# Altium PCB SkayboardRev4.PcbDoc (part 2 of 2)
Units mil, origin at the board's own origin, x right, y up, seen from the top; angles counter-clockwise.
Board outline 13972.57 x 4222.54 mil, 2 copper layers (Top Layer, Bottom Layer); 143 components, 152 nets, 1430 pads, 166 vias.
Unrouted connection lines stored in the file: 1.
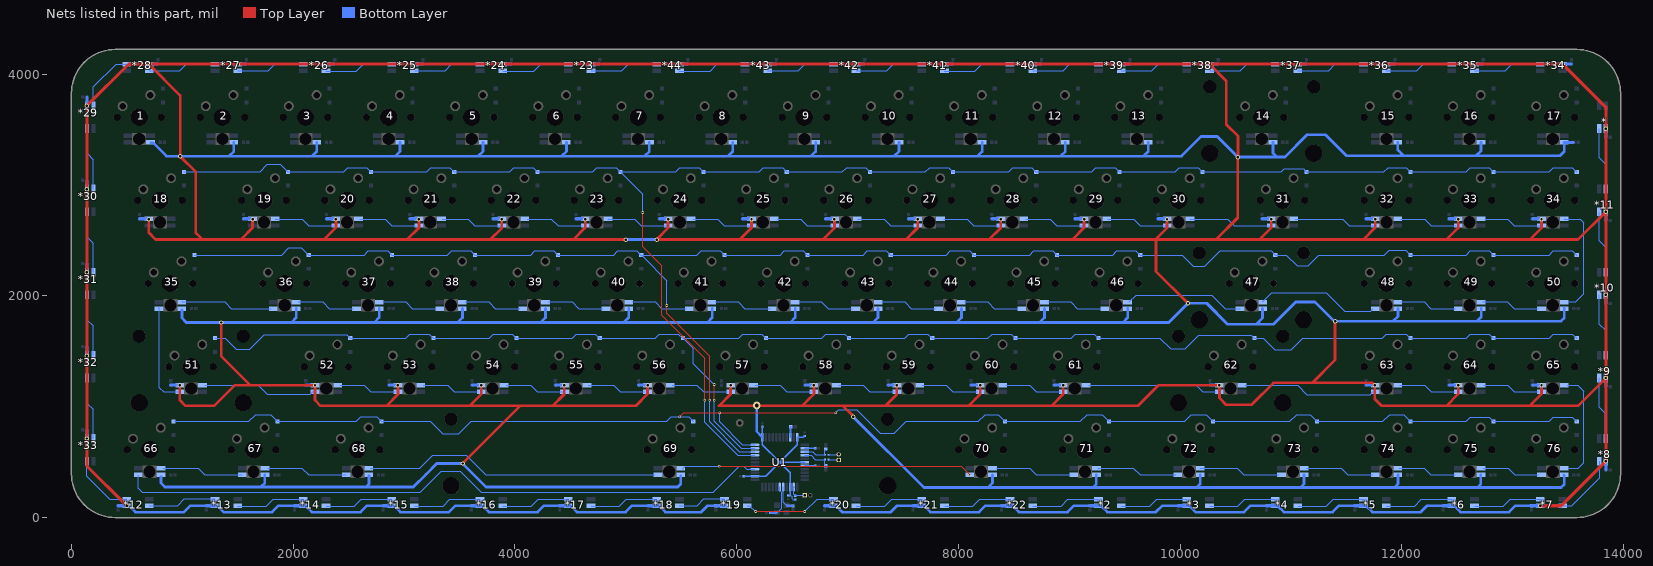
[diagram p2: the nets of this part, all layers, seen from the top]

## Via types
v1: diameter 24, hole 12, Top Layer to Bottom Layer, 92 vias
v2: diameter 40, hole 22, Top Layer to Bottom Layer, 73 vias
v3: diameter 30, hole 15, Top Layer to Bottom Layer, 1 vias

## Nets (pads, with @x,y where several pads share a name; then routed paths per layer and width w, separated by ;. In a path a pad name is that pad's centre, name@x,y a point inside that pad or via, vN(x,y) a via of type N, cw(c..) or ccw(c..) an arc to the next point about the centre after c; other vN are vias at no path point) (continued)
Net18_6: 18.6 19.6 20.6 21.6 22.6 23.6 24.6 25.6 26.6 27.6 28.6 29.6 30.6 31.6 32.6 33.6 34.6 U1.30 | length 16219.8
  Top Layer w5: v1(5153.54,2751.97) 5153.54,2440.94 5322.83,2271.65 5322.83,1826.77 5712.6,1437.01 v1(5712.6,1059.06)
  Bottom Layer w5: 18.6@1014.86,3118.5 1701.18,3118.5 1767.72,3185.04 1884.89,3185.04 1951.4,3118.53 19.6@1952.39,3118.53 2454.22,3118.53 2491.17,3155.49 2664.45,3155.49 20.6@2701.43,3118.51 ; 20.6@2702.39,3118.53 3204.22,3118.53 3241.17,3155.49 3414.45,3155.49 3451.43,3118.51 3953.26,3118.51 3990.22,3155.46 4163.49,3155.46 4200.48,3118.48 4702.3,3118.48 4739.26,3155.44 4912.54,3155.44 4949.52,3118.46 23.6@4952.4,3118.53 ; 23.6@4952.4,3118.53 4953.38,3118.53 23.6@4953.46,3118.46 ; v1(5153.54,2751.97) 5153.54,2917.39 4968.6,3102.33 4968.6,3103.31 23.6@4953.46,3118.46 ; 24.6@5698.56,3118.43 5661.58,3155.41 5488.3,3155.41 5451.35,3118.46 23.6@4953.46,3118.46 ; 24.6@5702.4,3118.53 6204.23,3118.53 6241.18,3155.49 6414.46,3155.49 25.6@6451.44,3118.51 ; v1(5712.6,1059.06) 5712.6,858.27 6007.87,562.99 6041.78,562.99 U1.30@6165.35,562.99 ; 25.6@6452.4,3118.53 6954.23,3118.53 6991.18,3155.49 7164.46,3155.49 7201.44,3118.51 7703.27,3118.51 7740.23,3155.46 7913.51,3155.46 7950.49,3118.48 8452.32,3118.48 8489.27,3155.44 8662.55,3155.44 28.6@8699.53,3118.46 ; 28.6@8702.4,3118.53 9204.23,3118.53 9241.18,3155.49 9414.46,3155.49 29.6@9451.44,3118.51 ; 29.6@9452.4,3118.53 9954.23,3118.53 9991.18,3155.49 10164.46,3155.49 30.6@10201.44,3118.51 ; 30.6@10202.4,3118.53 10912.52,3118.53 10939.65,3145.67 11112.93,3145.67 11123.66,3134.95 11123.66,3133.73 11148.7,3108.69 31.6@11149.91,3108.69 ; 31.6@11139.86,3118.51 11838.98,3118.51 11875.94,3155.47 12039.6,3155.47 12061.2,3133.87 12061.2,3133.75 12076.41,3118.53 32.6@12077.4,3118.53 ; 32.6@12078.69,3118.53 12579.23,3118.53 12616.18,3155.49 12789.46,3155.49 12826.44,3118.51 13328.27,3118.51 13365.23,3155.46 13538.51,3155.46 34.6@13575.49,3118.48
Net19_4: 19.4 20.2 | length 551.1
  Bottom Layer w5: 19.4@1838.68,2693.96 1839.72,2692.91 2079.73,2692.91 2138.78,2633.86 20.2@2364.88,2633.86
Net20_4: 20.4 21.2 | length 531
  Bottom Layer w5: 20.4@2602.14,2692.91 2829.73,2692.91 2888.78,2633.86 21.2@3108.72,2633.86
Net21_4: 21.4 22.2 | length 550.9
  Bottom Layer w5: 21.4@3346.07,2692.91 3579.73,2692.91 3638.78,2633.86 22.2@3872.49,2633.86
Net22_4: 22.4 23.2 | length 522.4
  Bottom Layer w5: 22.4@4109.72,2692.91 4329.74,2692.91 4388.8,2633.86 23.2@4607.66,2633.86
Net23_4: 23.4 24.2 | length 549
  Bottom Layer w5: 23.4@4838.69,2693.96 4839.74,2692.91 5079.74,2692.91 5138.8,2633.86 24.2@5362.78,2633.86
Net24_4: 24.4 25.2 | length 539.7
  Bottom Layer w5: 24.4@5608.71,2692.91 5829.74,2692.91 5888.8,2633.86 25.2@6123.92,2633.86
Net25_4: 25.4 26.2 | length 515.4
  Bottom Layer w5: 25.4@6367.38,2692.91 6579.74,2692.91 6638.8,2633.86 26.2@6858.37,2633.86
Net26_4: 26.4 27.2 | length 530.9
  Bottom Layer w5: 26.4@7091.74,2692.91 7329.74,2692.91 7388.8,2633.86 27.2@7598.16,2633.86
Net27_4: 27.4 28.2 | length 519
  Bottom Layer w5: 27.4@7865.9,2692.91 8079.74,2692.91 8138.8,2633.86 28.2@8360.46,2633.86
Net28_4: 28.4 29.2 | length 546.4
  Bottom Layer w5: 28.4@8608.01,2692.91 8829.74,2692.91 8888.8,2633.86 29.2@9129.92,2633.86
Net29_4: 29.4 30.2 | length 548
  Bottom Layer w5: 29.4@9348.83,2692.91 9579.74,2692.91 9638.8,2633.86 30.2@9872.4,2633.86
Net30_4: 30.4 31.2 | length 738.7
  Bottom Layer w5: 30.4@10088.69,2693.96 10089.74,2692.91 10429.13,2692.91 10488.19,2633.86 31.2@10802.54,2633.86
Net31_4: 31.4 32.2 | length 734.4
  Bottom Layer w5: 31.4@11037.96,2692.91 11468.5,2692.91 11527.56,2633.86 32.2@11747.9,2633.86
Net32_4: 32.4 33.2 | length 528.4
  Bottom Layer w5: 32.4@11988.48,2692.91 12204.74,2692.91 12263.8,2633.86 33.2@12492.42,2633.86
Net33_4: 33.4 34.2 | length 521.6
  Bottom Layer w5: 33.4@12746.18,2692.91 12954.74,2692.91 13013.8,2633.86 34.2@13243.35,2633.86
Net34_4: 34.4 50.4 | length 1003.3
  Bottom Layer w5: 34.4@13463.69,2693.96 13464.74,2692.91 13610.24,2692.91 13641.73,2661.42 13641.73,2019.68 13566.93,1944.88 50.4@13502.71,1944.88
Net35_2: 35.2 51.2 | length 911.2
  Bottom Layer w5: 35.2@791.34,1899.65 791.34,1173.23 830.71,1133.86 51.2@959.8,1133.86
Net35_4: 35.4 36.2 | length 828.5
  Bottom Layer w5: 35.4@996.69,1944.88 1381.89,1944.88 1440.94,1885.83 36.2@1800.71,1885.83
Net35_6: 35.6 36.6 37.6 38.6 39.6 40.6 41.6 42.6 43.6 44.6 45.6 46.6 47.6 48.6 49.6 50.6 U1.31 | length 15388.5
  Top Layer w5: v1(5370.08,1913.39) 5370.08,1842.52 5755.91,1456.69 v1(5755.91,1059.06)
  Bottom Layer w5: 35.6@1108.61,2368.5 1896.06,2368.5 1960.63,2433.07 2074.31,2433.07 2138.87,2368.5 36.6@2139.86,2368.5 2641.69,2368.5 2678.64,2405.46 2851.92,2405.46 2888.9,2368.48 3391.72,2368.48 3428.67,2405.43 3601.95,2405.43 3638.93,2368.45 4140.76,2368.45 4177.72,2405.41 4351,2405.41 4387.98,2368.43 4889.81,2368.43 4926.76,2405.38 5100.04,2405.38 40.6@5137.02,2368.4 ; 40.6@5139.86,2368.51 40.6@5140.84,2368.51 ; v1(5370.08,1913.39) 5370.08,2138.29 5156.06,2352.31 5156.06,2353.3 40.6@5140.88,2368.48 ; v1(5755.91,1059.06) 5755.91,863.12 6024.53,594.49 U1.31@6165.35,594.49 ; 41.6@5888.93,2368.45 5851.95,2405.43 5678.67,2405.43 5641.72,2368.48 40.6@5140.88,2368.48 ; 41.6@5889.82,2368.48 6391.65,2368.48 6428.61,2405.43 6601.88,2405.43 6638.87,2368.45 7140.69,2368.45 7177.65,2405.41 7350.93,2405.41 43.6@7387.91,2368.43 ; 43.6@7389.86,2368.51 7891.73,2368.48 7928.68,2405.43 8101.96,2405.43 44.6@8138.94,2368.45 ; 44.6@8139.86,2368.51 8641.73,2368.48 8678.68,2405.43 8851.96,2405.43 45.6@8888.94,2368.45 ; 45.6@8889.86,2368.51 9391.73,2368.48 9428.68,2405.43 9601.96,2405.43 46.6@9638.94,2368.45 ; 46.6@9639.86,2368.51 10017.32,2368.51 10118.11,2267.72 10224.41,2267.72 10362.2,2405.51 10820.61,2405.51 10857.61,2368.51 47.6@10858.6,2368.51 10958.26,2368.51 11055.12,2271.65 11157.48,2271.65 11251.97,2366.14 11842.52,2366.14 11885.83,2409.45 12035.5,2409.45 12076.41,2368.53 48.6@12077.4,2368.53 12579.23,2368.53 12616.18,2405.49 12789.46,2405.49 12826.44,2368.51 13328.27,2368.51 13365.23,2405.46 13538.51,2405.46 50.6@13575.49,2368.48
Net36_4: 36.4 37.2 | length 519.2
  Bottom Layer w5: 36.4@2047.66,1944.88 2265.2,1944.88 2324.26,1885.83 37.2@2542.42,1885.83
Net37_4: 37.4 38.2 | length 507.5
  Bottom Layer w5: 37.4@2808.29,1944.88 3015.2,1944.88 3074.26,1885.83 38.2@3291.33,1885.83
Net38_4: 38.4 39.2 | length 516.7
  Bottom Layer w5: 38.4@3549.78,1944.88 3765.2,1944.88 3824.26,1885.83 39.2@4042.03,1885.83
Net39_4: 39.4 40.2 | length 514.3
  Bottom Layer w5: 39.4@4300.35,1944.88 4515.21,1944.88 4574.27,1885.83 40.2@4790.23,1885.83
Net40_4: 40.4 41.2 | length 510.7
  Bottom Layer w5: 40.4@5058.37,1944.88 5265.21,1944.88 5324.27,1885.83 41.2@5544.6,1885.83
Net41_4: 41.4 42.2 | length 522.3
  Bottom Layer w5: 41.4@5806.24,1944.88 6015.21,1944.88 6074.27,1885.83 42.2@6304.05,1885.83
Net42_4: 42.4 43.2 | length 507.5
  Bottom Layer w5: 42.4@6560.55,1944.88 6765.21,1944.88 6824.27,1885.83 43.2@7043.59,1885.83
Net43_4: 43.4 44.2 | length 507
  Bottom Layer w5: 43.4@7308.51,1944.88 7515.21,1944.88 7574.27,1885.83 44.2@7791,1885.83
Net44_4: 44.4 45.2 | length 505.8
  Bottom Layer w5: 44.4@8054.69,1944.88 8265.21,1944.88 8324.27,1885.83 45.2@8536.01,1885.83
Net45_4: 45.4 46.2 | length 504.5
  Bottom Layer w5: 45.4@8804.09,1944.88 9015.21,1944.88 9074.27,1885.83 46.2@9284.14,1885.83
Net46_4: 46.4 47.2 | length 1070.6
  Bottom Layer w5: 46.4@9543.31,1944.88 9602.36,2003.94 10287.4,2003.94 10405.51,1885.83 10539.21,1885.83 47.2@10540.15,1884.89
Net47_4: 47.4 48.2 | length 1102.4
  Bottom Layer w5: 47.4@10744.09,1944.88 10826.77,2027.56 10850.39,2027.56 ; 10850.16,2027.56 11318.9,2027.56 11483.2,1863.25 11717.61,1863.25 48.2@11736.22,1881.87
Net48_4: 48.4 49.2 | length 515.7
  Bottom Layer w5: 48.4@11991.19,1944.88 12202.77,1944.88 12261.83,1885.83 49.2@12482.47,1885.83
Net49_4: 49.4 50.2 | length 525.9
  Bottom Layer w5: 49.4@12731.11,1944.88 12952.77,1944.88 13011.83,1885.83 50.2@13232.54,1885.83
Net51_4: 51.4 52.2 | length 1021.9
  Bottom Layer w5: 51.4@1200.73,1192.91 1685.04,1192.91 1764.72,1113.23 2155.09,1113.23 2175.71,1133.86 52.2@2181.1,1133.86
Net51_6: 51.6 52.6 53.6 54.6 55.6 56.6 57.6 58.6 59.6 60.6 61.6 62.6 63.6 64.6 65.6 U1.32 | length 14269.3
  Top Layer w5: v1@5794,1061.72 5799.21,1066.93 v1(5799.21,1200.79)
  Bottom Layer w5: 51.6@1296.11,1618.5 1389.37,1618.5 1488.19,1519.68 1610.24,1519.68 1740.16,1649.61 2482.78,1649.61 2513.87,1618.51 52.6@2514.86,1618.51 3016.69,1618.51 3053.64,1655.46 3226.92,1655.46 3263.9,1618.48 3766.72,1618.48 3803.67,1655.44 3976.95,1655.44 4013.93,1618.46 4515.76,1618.46 4552.72,1655.41 4726,1655.41 4762.98,1618.43 5264.81,1618.43 5301.76,1655.39 5475.04,1655.39 56.6@5512.02,1618.41 ; 56.6@5514.86,1618.52 56.6@5519.28,1618.52 ; v1(5799.21,1059.06) 5799.21,867.05 6040.28,625.98 U1.32@6165.35,625.98 ; v1@5801.51,1198.49 5798.78,1198.49 5795.58,1201.69 5795.58,1204.42 5610.24,1389.76 5610.24,1527.56 5519.31,1618.48 6016.72,1618.48 6053.67,1655.44 6226.95,1655.44 57.6@6263.93,1618.46 ; 57.6@6264.82,1618.48 6766.65,1618.48 6803.61,1655.44 6976.88,1655.44 7013.87,1618.46 7515.69,1618.46 7552.65,1655.41 7725.93,1655.41 59.6@7762.91,1618.43 ; 59.6@7764.86,1618.52 8266.73,1618.48 8303.68,1655.44 8476.96,1655.44 60.6@8513.94,1618.46 ; 60.6@8514.86,1618.52 9016.73,1618.48 9053.68,1655.44 9226.96,1655.44 61.6@9263.94,1618.46 ; 61.6@9264.86,1618.52 9818.49,1618.52 9913.39,1523.62 10047.24,1523.62 10169.29,1645.67 10642.98,1645.67 10670.13,1618.52 62.6@10671.12,1618.52 10751.56,1618.52 10854.33,1515.75 11003.94,1515.75 11106.3,1618.11 11822.83,1618.11 11858.27,1653.54 12041.41,1653.54 12076.41,1618.54 63.6@12077.4,1618.54 12579.23,1618.54 12616.18,1655.49 12789.46,1655.49 12826.44,1618.51 13328.27,1618.51 13365.23,1655.47 13538.51,1655.47 65.6@13575.49,1618.49
Net52_4: 52.4 53.2 | length 519.9
  Bottom Layer w5: 52.4@2423.73,1192.91 2642.18,1192.91 2701.23,1133.86 53.2@2919.12,1133.86
Net53_4: 53.4 54.2 | length 516.3
  Bottom Layer w5: 53.4@3172.94,1192.91 3392.18,1192.91 3451.23,1133.86 54.2@3664.74,1133.86
Net54_4: 54.4 55.2 | length 532.9
  Bottom Layer w5: 54.4@3923.58,1192.91 4142.19,1192.91 4201.24,1133.86 55.2@4432.04,1133.86
Net55_4: 55.4 56.2 | length 530.6
  Bottom Layer w5: 55.4@4662.29,1192.91 4892.19,1192.91 4951.24,1133.86 56.2@5168.45,1133.86
Net56_4: 56.4 57.2 | length 522.5
  Bottom Layer w5: 56.4@5418.48,1192.91 5642.19,1192.91 5701.24,1133.86 57.2@5916.47,1133.86
Net57_4: 57.4 58.2 | length 532
  Bottom Layer w5: 57.4@6166.24,1192.91 6392.19,1192.91 6451.24,1133.86 58.2@6673.77,1133.86
Net58_4: 58.4 59.2 | length 524.9
  Bottom Layer w5: 58.4@6918.92,1192.91 7142.19,1192.91 7201.24,1133.86 59.2@7419.34,1133.86
Net59_4: 59.4 60.2 | length 520.4
  Bottom Layer w5: 59.4@7672.6,1192.91 7892.19,1192.91 7951.24,1133.86 60.2@8168.58,1133.86
Net60_4: 60.4 61.2 | length 518
  Bottom Layer w5: 60.4@8428.94,1192.91 8642.19,1192.91 8701.24,1133.86 61.2@8922.43,1133.86
Net61_4: 61.4 62.2 | length 1174.2
  Bottom Layer w5: 61.4@9176.64,1192.91 10145.67,1192.91 10204.72,1133.86 62.2@10326.41,1133.86
Net62_4: 62.4 63.2 | length 1221.9
  Bottom Layer w5: 62.4@10582.01,1192.91 11059.06,1192.91 11141.73,1110.24 11714.6,1110.24 11738.23,1133.86 63.2@11759.84,1133.86
Net63_4: 63.4 64.2 | length 517.1
  Bottom Layer w5: 63.4@11982.85,1192.91 12204.74,1192.91 12263.8,1133.86 64.2@12475.51,1133.86
Net64_4: 64.4 65.2 | length 515.3
  Bottom Layer w5: 64.4@12739.63,1192.91 12954.74,1192.91 13013.8,1133.86 65.2@13230.45,1133.86
Net65_4: 65.4 76.4 | length 971.9
  Bottom Layer w5: 65.4@13493.97,1192.91 13586.61,1192.91 13641.73,1137.8 13641.73,496.06 13590.55,444.88 13503.4,444.88
Net66_2: 66.2 U1.26 | length 5960.6
  Bottom Layer w5: 66.2@602.36,381.31 602.36,263.78 637.8,228.35 3145.67,228.35 3334.65,417.32 3507.87,417.32 3696.31,228.88 5787.94,228.88 6023.62,464.57 6062.99,464.57 6090.55,437.01 U1.26@6165.35,437.01
Net66_4: 66.4 67.2 | length 737.3
  Bottom Layer w5: 66.4@827.73,444.88 1141.73,444.88 1200.79,385.83 1539.22,385.83 67.2@1540.16,384.88
Net66_6: 66.6 67.6 68.6 69.6 70.6 71.6 72.6 73.6 74.6 75.6 76.6 U1.33 | length 13938.8
  Top Layer w5: v1(5488.07,909.45) 5523.5,944.88 v1(5846.46,944.88) v1(6893.7,944.88)
  Bottom Layer w5: 66.6@921.11,868.51 1600.79,868.51 1661.42,929.13 1797,929.13 1857.63,868.51 67.6@1858.61,868.51 2569.3,868.51 2610.24,909.45 2753.21,909.45 2794.15,868.51 68.6@2795.13,868.51 ; 68.6@2796.11,868.51 3237.79,868.51 3350.39,755.91 3492.13,755.91 3606.3,870.08 5370.08,870.08 5409.45,909.45 v1(5488.07,909.45) 5566.68,909.45 5607.61,868.52 69.6@5608.6,868.52 ; v1(5846.46,944.88) 5846.46,863.12 6052.09,657.48 U1.33@6165.35,657.48 ; v1(6893.7,944.88) 6921.26,972.44 7082.68,972.44 7295.28,759.84 7421.26,759.84 7531.5,870.08 8181.1,870.08 8240.16,929.13 8359.52,929.13 8420.13,868.52 70.6@8421.12,868.52 9100.8,868.52 9161.43,929.15 9297.01,929.15 9357.64,868.52 10041.75,868.52 10102.38,929.15 10233.53,929.15 10294.16,868.52 72.6@10295.14,868.52 ; 72.6@10296.12,868.52 10990.56,868.52 11051.19,929.15 11172.01,929.15 11232.64,868.52 11829.15,868.52 11889.76,929.13 12016.8,929.13 74.6@12077.4,868.54 ; 74.6@12080.29,868.54 12579.23,868.54 12616.18,905.49 12789.46,905.49 12826.44,868.51 13328.27,868.51 13365.23,905.47 13538.51,905.47 76.6@13575.49,868.49
Net67_4: 67.4 68.2 | length 729.8
  Bottom Layer w5: 67.4@1772.68,444.88 2079.24,444.88 2138.3,385.83 2476.72,385.83 68.2@2477.66,384.89
Net68_4: 68.4 69.2 | length 2690.1
  Bottom Layer w5: 68.4@2695.17,444.88 3141.73,444.88 3259.84,562.99 3559.06,562.99 3736.22,385.83 69.2@5262.93,385.83
Net69_4: 69.4 70.2 | length 2633
  Top Layer w5: v1(5842.52,464.57) 8023.62,464.57 v1(8102.36,385.83)
  Bottom Layer w5: 69.4@5511.81,440.94 5535.43,464.57 v1(5842.52,464.57)
Net70_4: 70.4 71.2 | length 691
  Bottom Layer w5: 70.4@8342.89,444.88 8641.76,444.88 8700.81,385.83 71.2@9009.42,385.83
Net71_4: 71.4 72.2 | length 730.7
  Bottom Layer w5: 71.4@9256.38,444.88 9579.24,444.88 9638.29,385.83 72.2@9962.61,385.83
Net72_4: 72.4 73.2 | length 732.6
  Bottom Layer w5: 72.4@10182.39,443.95 10183.33,444.88 10516.76,444.88 10575.81,385.83 73.2@10890.18,385.83
Net73_4: 73.4 74.2 | length 626.8
  Bottom Layer w5: 73.4@11136.36,444.88 11454.24,444.88 11513.29,385.83 74.2@11738.73,385.83
Net74_4: 74.4 75.2 | length 529.2
  Bottom Layer w5: 74.4@11976.7,444.88 12202.78,444.88 12261.83,385.83 75.2@12481.42,385.83
Net75_4: 75.4 76.2 | length 522.1
  Bottom Layer w5: 75.4@12736.3,444.88 12958.51,444.88 13017.56,385.83 76.2@13233.97,385.83
Net*2_2: *2.2 *22.4 | length 618.4
  Bottom Layer w5: *22.4@8670.87,103.8 8926.63,103.8 8988.19,165.35 *2.2@9263.78,165.35
Net*2_4: *2.4 *3.2 | length 618.4
  Bottom Layer w5: *2.4@9470.08,103.8 9725.84,103.8 9787.4,165.35 *3.2@10062.99,165.35
Net*3_4: *3.4 *4.2 | length 618.4
  Bottom Layer w5: *3.4@10265.35,103.8 10521.12,103.8 10582.68,165.35 *4.2@10858.27,165.35
Net*4_4: *4.4 *5.2 | length 618.4
  Bottom Layer w5: *4.4@11064.57,103.8 11320.33,103.8 11381.89,165.35 *5.2@11657.48,165.35
Net*5_4: *5.4 *6.2 | length 618.4
  Bottom Layer w5: *5.4@11859.84,103.8 12115.61,103.8 12177.17,165.35 *6.2@12452.76,165.35
Net*6_4: *6.4 *7.2 | length 618.4
  Bottom Layer w5: *6.4@12659.06,103.8 12914.82,103.8 12976.38,165.35 *7.2@13251.97,165.35
Net*7_4: *7.4 *8.2 | length 586.5
  Bottom Layer w5: *7.4@13452.36,107.73 13532.97,107.73 13783.46,358.23 13783.46,506.68 *8.2@13781.21,508.93
Net*8_4: *8.4 *9.2 | length 570
  Bottom Layer w5: *9.2@13779.53,1259.84 13779.53,996.06 13836.65,938.94 *8.4@13836.65,713.55
Net*9_4: *9.4 *10.2 | length 570
  Bottom Layer w5: *10.2@13781.21,2008.92 13781.21,1745.14 13838.33,1688.03 *9.4@13838.33,1462.63
Net*10_4: *10.4 *11.2 | length 570
  Bottom Layer w5: *11.2@13781.21,2758.92 13781.21,2495.14 13838.33,2438.03 *10.4@13838.33,2212.63
Net*11_4: *11.4 *.2 | length 570
  Bottom Layer w5: *.2@13781.21,3508.92 13781.21,3245.14 13838.33,3188.03 *11.4@13838.33,2962.63
Net*12_2: *12.2 *33.4 | length 579
  Bottom Layer w5: *33.4@139.73,508.9 139.73,373.38 346.32,166.79 *12.2@497.64,166.79
Net*12_4: *12.4 *13.2 | length 618.4
  Bottom Layer w5: *12.4@702.36,107.73 958.13,107.73 1019.68,169.29 *13.2@1295.28,169.29
Net*13_4: *13.4 *14.2 | length 618.4
  Bottom Layer w5: *13.4@1501.57,103.8 1757.34,103.8 1818.9,165.35 *14.2@2094.49,165.35
Net*14_4: *14.4 *15.2 | length 618.4
  Bottom Layer w5: *14.4@2296.85,103.8 2552.61,103.8 2614.17,165.35 *15.2@2889.76,165.35
Net*15_4: *15.4 *16.2 | length 618.4
  Bottom Layer w5: *15.4@3096.06,103.8 3351.83,103.8 3413.39,165.35 *16.2@3688.98,165.35
Net*16_4: *16.4 *17.2 | length 618.4
  Bottom Layer w5: *16.4@3891.34,103.8 4147.1,103.8 4208.66,165.35 *17.2@4484.25,165.35
Net*17_4: *17.4 *18.2 | length 618.4
  Bottom Layer w5: *17.4@4686.61,103.8 4942.38,103.8 5003.94,165.35 *18.2@5279.53,165.35
Net*18_4: *18.4 *19.2 | length 433.3
  Bottom Layer w5: *18.4@5483.61,107.73 5643.17,107.73 5704.72,169.29 5885.83,169.29 *19.2@5889.76,165.35
Net*19_4: *19.4 *20.2 | length 846.2
  Top Layer w5: v1(6173.23,55.12) v1(6614.17,55.12)
  Bottom Layer w5: *19.4@6094.49,107.73 6114.17,107.73 6166.79,55.12 v1(6173.23,55.12) ; v1(6614.17,55.12) 6725.84,166.79 *20.2@6872.64,166.79
Net*20_4: *20.4 *21.2 | length 618.4
  Bottom Layer w5: *20.4@7080.32,103.8 7336.08,103.8 7397.64,165.35 *21.2@7673.23,165.35
Net*21_4: *21.4 *22.2 | length 618.4
  Bottom Layer w5: *21.4@7875.59,103.8 8131.35,103.8 8192.91,165.35 *22.2@8468.5,165.35
Net*23_2: *23.2 *44.4 | length 618.4
  Bottom Layer w5: *23.2@4688.98,4031.5 4964.57,4031.5 5026.13,4093.06 *44.4@5281.89,4093.06
Net*23_4: *23.4 *24.2 | length 618.4
  Bottom Layer w5: *24.2@3893.7,4027.56 4169.29,4027.56 4230.85,4089.12 *23.4@4486.61,4089.12
Net*24_4: *24.4 *25.2 | length 618.4
  Bottom Layer w5: *25.2@3094.49,4031.5 3370.08,4031.5 3431.64,4093.06 *24.4@3687.4,4093.06
Net*25_4: *25.4 *26.2 | length 618.4
  Bottom Layer w5: *26.2@2295.28,4027.56 2570.87,4027.56 2632.43,4089.12 *25.4@2888.19,4089.12
Net*26_4: *26.4 *27.2 | length 618.4
  Bottom Layer w5: *27.2@1500,4031.5 1775.59,4031.5 1837.15,4093.06 *26.4@2092.91,4093.06
Net*27_4: *27.4 *28.2 | length 618.4
  Bottom Layer w5: *28.2@700.79,4031.5 976.38,4031.5 1037.94,4093.06 *27.4@1293.7,4093.06
Net*28_4: *28.4 *29.2 | length 556.7
  Bottom Layer w5: *29.2@198.79,3713.67 198.79,3887.21 402.13,4090.55 497.35,4090.55 *28.4@497.64,4090.27
Net*29_4: *29.4 *30.2 | length 570
  Bottom Layer w5: *29.4@141.67,3509.92 141.67,3284.52 198.79,3227.4 *30.2@198.79,2963.62
Net*30_4: *30.4 *31.2 | length 570
  Bottom Layer w5: *30.4@139.73,2758.89 139.73,2533.5 196.85,2476.38 *31.2@196.85,2212.6
Net*31_4: *31.4 *32.2 | length 570
  Bottom Layer w5: *31.4@139.73,2010.86 139.73,1785.46 196.85,1728.35 *32.2@196.85,1464.57
Net*32_4: *32.4 *33.2 | length 570
  Bottom Layer w5: *32.4@139.73,1258.9 139.73,1033.5 196.85,976.38 *33.2@196.85,712.6
Net*34_4: *34.4 *35.2 | length 618.4
  Bottom Layer w5: *35.2@12657.48,4031.5 12933.07,4031.5 12994.63,4093.06 *34.4@13250.39,4093.06
Net*35_4: *35.4 *36.2 | length 618.4
  Bottom Layer w5: *36.2@11858.27,4031.5 12133.86,4031.5 12195.42,4093.06 *35.4@12451.18,4093.06
Net*36_4: *36.4 *37.2 | length 618.4
  Bottom Layer w5: *37.2@11062.99,4031.5 11338.58,4031.5 11400.14,4093.06 *36.4@11655.91,4093.06
Net*37_4: *37.4 *38.2 | length 618.4
  Bottom Layer w5: *38.2@10267.72,4031.5 10543.31,4031.5 10604.87,4093.06 *37.4@10860.63,4093.06
Net*38_4: *38.4 *39.2 | length 618.4
  Bottom Layer w5: *39.2@9468.5,4031.5 9744.09,4031.5 9805.65,4093.06 *38.4@10061.42,4093.06
Net*39_4: *39.4 *40.2 | length 618.4
  Bottom Layer w5: *40.2@8669.29,4031.5 8944.88,4031.5 9006.44,4093.06 *39.4@9262.2,4093.06
Net*40_4: *40.4 *41.2 | length 618.4
  Bottom Layer w5: *41.2@7874.02,4027.56 8149.61,4027.56 8211.17,4089.12 *40.4@8466.93,4089.12
Net*41_4: *41.4 *42.2 | length 618.4
  Bottom Layer w5: *42.2@7078.74,4031.5 7354.33,4031.5 7415.89,4093.06 *41.4@7671.65,4093.06
Net*42_4: *42.4 *43.2 | length 618.4
  Bottom Layer w5: *43.2@6279.53,4031.5 6555.12,4031.5 6616.68,4093.06 *42.4@6872.44,4093.06
Net*43_4: *43.4 *44.2 | length 618.4
  Bottom Layer w5: *44.2@5484.25,4027.56 5759.84,4027.56 5821.4,4089.12 *43.4@6077.17,4089.12
NetC1_2: C1.2 U1.42 | length 96.3
  Bottom Layer w15: U1.42@6484.25,724.41 6485.9,726.06 6485.9,816.22 C1.2@6488.58,818.9
NetC2_1: C2.1 R1.1 U1.3 | length 240.5
  Bottom Layer w5: U1.3@6614.17,594.49 6685.04,594.49 6712.6,566.93 R1.1@6795.28,566.93 C2.1@6795.28,614.17
  Bottom Layer w10: C2.1@6807.09,618.11 C2.1@6807.09,618.9
NetC3_2: C3.2 R2.1 U1.4 | length 255.8
  Bottom Layer w5: U1.4@6614.17,562.99 6670.96,562.99 6710.33,523.62 R2.1@6795.28,523.62 ; C3.2@6795.99,475.66 R2.1@6795.99,522.9
  Bottom Layer w10: R2.1@6795.28,523.62 R2.1@6795.99,522.9 ; C3.2@6795.99,475.66 C3.2@6803.15,468.5
NetC4_2: C4.2 U1.16 | length 236
  Bottom Layer w5: U1.16@6421.37,278.94 6421.37,136.52 6447.66,110.24 ; 6446.85,110.24 6447.66,110.24 ; 6448.59,109.3 6447.66,110.24 ; 6448.82,110.24 6447.66,110.24
  Bottom Layer w20: 6454.72,106.3 C4.2@6507.87,106.3
NetC5_2: C5.2 U1.17 | length 315.4
  Bottom Layer w5: 6364.17,43.31 6405.55,84.68 6405.55,228.45 6404.63,229.32 cw(c6421.26,247.05) 6402.98,231.03 6402.86,231.14 6390.06,243.94 U1.17@6390.06,276.85
  Bottom Layer w20: C5.2@6304.72,43.31 6304.93,43.51 6360.44,43.51 6362.2,45.28
NetR1_2: R1.2 USB.2 | length 99.6
  Bottom Layer w5: R1.2@6828.15,568.31 USB.2@6923.82,568.31
  Bottom Layer w10: R1.2@6826.77,566.93 R1.2@6828.15,568.31 ; USB.2@6923.82,568.31 USB.2@6925.2,569.68
NetR2_2: R2.2 USB.1 | length 100.1
  Bottom Layer w5: R2.2@6826.77,523.62 USB.1@6921.26,523.62
  Bottom Layer w10: USB.1@6921.26,523.62 USB.1@6925.2,519.68
NetR3_2: R3.2 RST.1 U1.13 | length 172.6
  Bottom Layer w7.5: U1.13@6515.75,275.59 6515.75,210.63 R3.2@6527.56,198.82 ; R3.2@6528.54,199.8 RST.1@6614.37,199.8
  Bottom Layer w15: U1.13@6515.75,275.59 U1.13@6517.4,273.94 ; R3.2@6527.56,198.82 R3.2@6528.54,199.8 ; RST.1@6614.37,199.8 RST.1@6615.35,200.79
VCC: 1.3 2.3 3.3 4.3 5.3 6.3 7.3 8.3 9.3 10.3 11.3 12.3 13.3 14.3 15.3 16.3 17.3 18.1 19.1 20.1 21.1 22.1 23.1 24.1 25.1 26.1 27.1 28.1 29.1 30.1 31.1 32.1 33.1 34.1 35.3 36.3 37.3 38.3 39.3 40.3 41.3 42.3 43.3 44.3 45.3 46.3 47.3 48.3 49.3 50.3 51.1 52.1 53.1 54.1 55.1 56.1 57.1 58.1 59.1 60.1 61.1 62.1 63.1 64.1 65.1 66.3 67.3 68.3 69.3 70.3 71.3 72.3 73.3 74.3 75.3 76.3 *2.1 *3.1 *4.1 *5.1 *6.1 *7. *7.1 *8.1 *9.1 *10.1 *11.1 *12.1 *13.1 *14.1 *15.1 *16.1 *17.1 *18.1 *19. *19.1 *20.1 *21.1 *22.1 *23.1 *24.1 *25.1 *26.1 *27.1 *28.1 *29.1 *30.1 *31.1 *32.1 *33.1 *34.1 *35.1 *36.1 *37.1 *38.1 *39.1 *40.1 *41.1 *42.1 *43.1 *44.1 *.1 C6.1 C7.1 C8.1 C9.1 C10.1 C11.1 pad.@6181.1,1011.81 R3.1 U1.2 U1.6 U1.7 U1.14 U1.24 U1.34 U1.44 | length 117103.5
  Top Layer w25: v2(696.85,2692.91) 696.85,2570.87 759.84,2507.87 1181.1,2507.87 ; v2@701.49,4086.52 980.63,3807.38 v2@980.63,3259.53 ; v2(976.38,1192.91) 976.38,1059.06 1027.58,1007.85 1287.38,1007.85 1472.44,1192.91 1614.17,1192.91 ; v2(980.32,3259.84) v2@980.63,3259.53 ; v2@980.63,3258.53 v2@980.63,3259.53 ; v2(1350.39,1759.84) 1350.39,1456.69 1614.17,1192.91 ; v2(1633.86,2692.91) 1633.86,2614.17 1527.56,2507.87 ; v2(2385.83,2692.91) 2385.83,2616.14 2277.56,2507.87 ; v2(2944.88,1192.91) 2944.88,1112.7 2840.04,1007.85 ; v2(3133.86,2692.91) 3133.86,2614.17 3027.56,2507.88 ; v2(3527.56,488.19) 4047.23,1007.86 ; v2(3696.85,1192.91) 3696.85,1114.67 3590.04,1007.86 ; v2(3881.89,2692.91) 3881.89,2612.2 3777.57,2507.88 ; v2(4444.88,1192.91) 4444.88,1112.71 4340.03,1007.86 ; v2(4633.86,2692.91) 4633.86,2614.16 4527.57,2507.87 ; v2(5000,2507.87) 4527.57,2507.87 ; v2(5196.85,1192.91) 5196.85,1114.68 5090.03,1007.86 4340.03,1007.86 ; v2(5381.89,2692.91) 5381.89,2612.19 5279.53,2509.83 v2(5279.53,2507.87) 6027.57,2507.87 ; v2(5944.88,1192.91) 5944.88,1112.71 5840.03,1007.86 6590.03,1007.86 ; v2(6133.86,2692.91) 6133.86,2614.16 6027.57,2507.87 ; v2(6696.85,1192.91) 6696.85,1114.68 6653.12,1070.94 6590.03,1007.86 ; v2(6881.89,2692.91) 6881.89,2612.19 6777.57,2507.87 ; v2(7051.18,909.45) 7049.11,909.45 7047.24,911.32 7047.24,921.26 6960.65,1007.86 ; v2(7444.88,1192.91) 7444.88,1112.71 7403.12,1070.94 7340.03,1007.86 ; v2(7633.86,2692.91) 7633.86,2614.16 7527.57,2507.87 ; v2(8196.85,1192.91) 8196.85,1114.68 8153.12,1070.94 8090.03,1007.86 ; v2(8381.89,2692.91) 8381.89,2612.19 8277.57,2507.87 ; v2(8944.88,1192.91) 8944.88,1112.71 8840.03,1007.86 ; v2(9133.86,2692.91) 9133.86,2614.16 9027.57,2507.87 ; v2(9881.89,2692.91) 9881.89,2612.19 9777.57,2507.87 9027.57,2507.87 ; v2(10070.87,1933.07) 9783.46,2220.47 9783.46,2507.85 10322.83,2507.85 ; v2@10264.86,4090.27 10415.8,3939.33 10415.8,3546.08 10520.93,3440.95 v2@10520.93,3250.35 ; v2(10519.69,3251.97) 10519.69,2704.7 10322.83,2507.85 ; 10669.29,2507.85 10322.83,2507.85 ; 10669.29,2507.87 10715.05,2507.87 ; v2(10822.83,2692.91) 10822.83,2615.66 10715.05,2507.87 ; v2(11397.64,1771.65) 11397.64,1421.26 11192,1215.62 ; v2(11759.84,2692.91) 11759.84,2615.15 11652.57,2507.87 ; v2(12507.87,1192.91) 12507.87,1113.18 12402.57,1007.88 ; v2(12507.87,2692.91) 12507.87,2613.18 12402.57,2507.87 ; v2(13259.84,1192.91) 13259.84,1115.15 13152.57,1007.88 ; v2(13259.84,2692.91) 13259.84,2611.4 13156.32,2507.87 ; v2(13840.27,1258.93) 13589.22,1007.88 13152.57,1007.88 ; v2@13840.58,2758.92 13840.42,2758.77 13589.53,2507.87 13156.32,2507.87 ; v2@980.63,3259.53 1122.05,3118.11 1122.05,2566.93 1181.1,2507.87 ; 1181.1,2507.87 1527.56,2507.87 ; 1527.56,2507.87 2277.56,2507.87 ; 1614.17,1192.91 v2(2196.85,1192.91) 2196.85,1059.06 2248.06,1007.85 2751.45,1007.85 2840.04,1007.85 ; 2277.56,2507.87 2938.98,2507.87 3027.56,2507.88 ; 2840.04,1007.85 3501.45,1007.85 3590.04,1007.86 ; 3027.56,2507.88 3777.57,2507.88 ; 3590.04,1007.86 4047.23,1007.86 ; 3777.57,2507.87 4527.57,2507.87 ; 4047.23,1007.86 4340.03,1007.86 ; 6027.57,2507.87 6777.57,2507.87 ; 6590.03,1007.86 6960.65,1007.86 ; 6777.57,2507.87 7527.57,2507.87 ; 6960.65,1007.86 7340.03,1007.86 ; 7340.03,1007.86 8090.03,1007.86 ; 7527.57,2507.87 8277.57,2507.87 ; 8090.03,1007.86 8840.03,1007.86 ; 8277.57,2507.87 9027.57,2507.87 ; 8840.03,1007.86 9618.09,1007.86 9803.15,1192.91 v2(10354.33,1192.91) 10354.33,1078.74 10414.84,1018.23 10644.21,1018.23 10841.6,1215.62 11192,1215.62 ; 10715.05,2507.87 11563.99,2507.87 11652.57,2507.87 ; 11192,1215.62 11733.2,1215.62 v2(11755.91,1192.91) 11755.91,1070.87 11818.89,1007.88 12402.57,1007.88 ; 11652.57,2507.87 12402.57,2507.87 ; 12402.57,1007.88 13152.57,1007.88 ; 12402.57,2507.87 13156.32,2507.87
  Top Layer w29: v2(497.64,107.42) 139.73,465.33 v2(139.73,713.62) v2(139.73,2213.62) v2(139.73,3713.67) 514.85,4088.79 700.88,4088.79 v2(702.36,4090.27) v2(2296.11,4090.27) v2(3889.86,4090.27) v2(4686.74,4090.27) v2(7077.36,4090.27) v2(8671.11,4090.27) 10264.86,4090.27 v2(11858.61,4090.27) v2(13452.36,4090.27) 13840.27,3702.36 v2(13840.27,3508.92) 13840.42,3508.77 13840.42,2758.77 13840.42,509.08 v2(13840.58,508.93) 13439.07,107.42 v2(13247.64,107.42)
  Bottom Layer w5: 6476.41,196.82 6492.15,196.82 6499.41,189.57 6499.41,169.88 6506.09,163.2 6527.37,163.2 R3.1@6527.56,163.39
  Bottom Layer w15: C7.1@6062.99,374.02 U1.24@6165.35,374.02 6263.78,374.02 6383.55,493.79 6383.55,506.21 6232.28,657.48 U1.34@6232.28,724.41 C9.1@6232.28,821.63 ; 6476.38,196.85 6484.25,204.72 U1.14@6484.25,275.59 6484.25,405.51 6389.76,500 ; U1.7@6614.17,468.5 C6.1@6708.66,468.5 ; U1.6@6614.17,500 6389.76,500 ; U1.2@6614.17,625.98 C10.1@6708.66,625.98 ; C8.1@6614.17,736.22 6602.36,724.41 U1.44@6547.24,724.41 6547.24,657.48 6389.76,500
  Bottom Layer w20: pad.@6181.1,1011.81 6181.1,775.59 U1.34@6229.47,727.22
  Bottom Layer w25: *12.1@524.51,100.55 576.3,48.75 1013.48,48.75 1072.18,107.46 1215.87,107.46 ; 1.3@716.54,3381.89 736.36,3381.89 740.5,3377.75 740.5,3377.61 858.27,3259.84 v2(980.32,3259.84) 1421.26,3259.84 ; 66.3@807.09,369.29 807.09,311.02 842.52,275.59 2657.48,275.59 ; 35.3@996.06,1871.49 996.06,1799.21 1035.43,1759.84 v2(1350.39,1759.84) 1984.25,1759.84 ; *13.1@1321.38,100.55 1373.18,48.75 1810.35,48.75 1869.06,107.46 2012.75,107.46 ; 2.3@1464.57,3385.58 1464.57,3303.15 1421.26,3259.84 ; 1716.54,283.46 1744.09,311.02 67.3@1744.09,385.58 ; 36.3@2027.56,1885.58 2027.56,1803.15 1984.25,1759.84 ; *14.1@2118.26,100.55 2170.05,48.75 2607.23,48.75 2665.93,107.46 2809.62,107.46 ; 3.3@2212.6,3385.58 2212.6,3303.15 2169.29,3259.84 ; 68.3@2685.04,377.7 2685.04,303.15 2657.48,275.59 ; 37.3@2775.59,1885.58 2775.59,1803.15 2732.28,1759.84 ; *15.1@2915.13,100.55 2966.93,48.75 3404.1,48.75 3462.81,107.46 3606.5,107.46 ; 4.3@2964.57,3385.58 2964.57,3303.15 2921.26,3259.84 ; 3196.85,389.76 3082.68,275.59 2657.48,275.59 ; 3197.19,390.1 3295.28,488.19 v2(3527.56,488.19) 3740.16,275.59 5467.57,275.59 ; 38.3@3527.56,1885.58 3527.56,1803.15 3484.25,1759.84 ; 5.3@3712.6,3385.58 3712.6,3303.15 3669.29,3259.84 ; *16.1@3713.58,100.51 3765.37,48.72 4202.55,48.72 4261.25,107.42 4404.94,107.42 ; 39.3@4275.59,1885.58 4275.59,1803.15 4232.28,1759.84 ; 6.3@4464.57,3385.58 4464.57,3303.15 4421.26,3259.84 ; *17.1@4508.88,100.55 4560.68,48.75 4997.85,48.75 5056.56,107.46 5200.25,107.46 ; v2(5000,2507.87) v2(5279.53,2507.87) ; 40.3@5026.13,1884.89 5027.56,1883.46 5027.56,1807.09 4980.31,1759.84 ; 7.3@5212.6,3385.58 5212.6,3303.15 5169.29,3259.84 ; *18.1@5278.89,107.73 5298.57,107.73 5305.76,100.55 5305.76,100.16 5357.16,48.75 5680.67,48.75 5739.38,107.46 *19.@5811.12,107.46 ; 5468.5,275.59 5496.06,303.15 69.3@5496.06,377.71 ; 41.3@5779.53,1885.58 5779.53,1803.15 5736.22,1759.84 ; 8.3@5964.57,3385.58 5964.57,3303.15 5921.26,3259.84 ; 42.3@6527.56,1885.58 6527.56,1803.15 6484.25,1759.84 ; 9.3@6712.6,3385.58 6712.6,3303.15 6669.29,3259.84 ; *20.1@6901.08,100.51 6952.87,48.72 7390.05,48.72 7448.75,107.42 7592.44,107.42 ; v2(7051.18,909.45) 7688.98,271.65 8267.72,271.65 ; 43.3@7275.59,1885.58 7275.59,1803.15 7232.28,1759.84 ; 10.3@7464.57,3385.58 7464.57,3303.15 7421.26,3259.84 ; *21.1@7696.38,100.55 7748.18,48.75 8185.35,48.75 8244.06,107.46 8387.75,107.46 ; 44.3@8027.56,1885.58 8027.56,1803.15 7984.25,1759.84 ; 11.3@8214.33,3385.44 8214.33,3303.02 8171.16,3259.84 ; 70.3@8307.39,384.74 8307.39,311.33 8267.72,271.65 ; *22.1@8494.83,100.51 8546.62,48.72 8983.8,48.72 9042.5,107.42 9186.19,107.42 ; 45.3@8775.59,1885.58 8775.59,1803.15 8732.28,1759.84 ; 12.3@8964.57,3385.58 8964.57,3303.15 8921.26,3259.84 ; 71.3@9244.09,385.58 9244.09,303.15 9212.6,271.65 ; *2.1@9291.7,100.51 9343.5,48.72 9780.67,48.72 9839.38,107.42 9983.07,107.42 ; 46.3@9527.56,1885.58 9527.56,1803.15 9484.25,1759.84 ; 13.3@9712.6,3385.58 9712.6,3303.15 9669.29,3259.84 ; *3.1@10088.58,100.51 10140.37,48.72 10577.55,48.72 10636.25,107.42 10779.94,107.42 ; 72.3@10181.1,385.58 10181.1,303.15 10149.61,271.65 ; 47.3@10744.09,1885.83 10744.09,1799.21 10688.98,1744.09 ; 14.3@10838.67,3384.91 10838.67,3287.31 10874.02,3251.97 ; *4.1@10885.45,100.51 10937.25,48.72 11374.42,48.72 11433.13,107.42 11576.82,107.42 ; 73.3@11118.11,385.58 11118.11,303.15 11086.61,271.65 ; *5.1@11681.84,100.67 11733.64,48.87 12170.81,48.87 12229.51,107.58 12373.2,107.58 ; 15.3@11963.67,3384.91 11963.67,3315.86 12015.75,3263.78 ; 74.3@11964.57,385.58 11964.57,303.15 11933.07,271.65 ; 48.3@11964.57,1885.58 11964.57,1814.96 11921.26,1771.65 ; *6.1@12450.76,107.42 12456.7,107.42 12470.76,107.42 12477.63,100.55 12529.43,48.75 12966.6,48.75 13025.31,107.46 *7.@13169,107.46 ; 75.3@12712.6,385.58 12712.6,303.15 12681.1,271.65 ; 16.3@12713.64,3384.93 12713.64,3308.13 12669.29,3263.78 ; 49.3@12716.54,1885.58 12716.54,1811.02 12677.17,1771.65 ; 76.3@13463.67,384.91 13463.67,378.62 13464.57,377.73 13464.57,299.21 13437.01,271.65 12681.1,271.65 ; 50.3@13464.57,1889.51 13464.57,1799.21 13437.01,1771.65 12677.17,1771.65 ; 17.3@13464.57,3385.58 13464.57,3384.75 13464.57,3303.15 13425.2,3263.78 12669.29,3263.78 ; 1421.26,3259.84 2169.29,3259.84 ; 1984.25,1759.84 2732.28,1759.84 ; 2169.29,3259.84 2921.26,3259.84 ; 2732.28,1759.84 3484.25,1759.84 ; 2921.26,3259.84 3669.29,3259.84 ; 3484.25,1759.84 4232.28,1759.84 ; 3669.29,3259.84 4421.26,3259.84 ; 4232.28,1759.84 4980.31,1759.84 ; 4421.26,3259.84 5169.29,3259.84 ; 4980.31,1759.84 5736.22,1759.84 ; 5169.29,3259.84 5921.26,3259.84 ; 5736.22,1759.84 6484.25,1759.84 ; 5921.26,3259.84 6669.29,3259.84 ; 6484.25,1759.84 7232.28,1759.84 ; 6669.29,3259.84 7421.26,3259.84 ; 7232.28,1759.84 7984.25,1759.84 ; 7421.26,3259.84 8171.16,3259.84 ; 7984.25,1759.84 8732.28,1759.84 ; 8171.16,3259.84 8921.26,3259.84 ; 8267.72,271.65 9212.6,271.65 ; 8732.28,1759.84 9484.25,1759.84 ; 8921.26,3259.84 9669.29,3259.84 ; 9212.6,271.65 10149.61,271.65 ; 9484.25,1759.84 9897.64,1759.84 v2(10070.87,1933.07) 10240.16,1933.07 10429.13,1744.09 10688.98,1744.09 ; 9669.29,3259.84 10011.81,3259.84 10188.98,3437.01 10334.65,3437.01 v2(10519.69,3251.97) 10874.02,3251.97 ; 10149.61,271.65 11086.61,271.65 ; 10688.98,1744.09 10842.52,1744.09 11043.31,1944.88 11216.54,1944.88 11389.76,1771.65 v2(11397.64,1771.65) 11921.26,1771.65 ; 10874.02,3251.97 10944.88,3251.97 11145.67,3452.76 11311.02,3452.76 11500,3263.78 12015.75,3263.78 ; 11086.61,271.65 11933.07,271.65 ; 11921.26,1771.65 12677.17,1771.65 ; 11933.07,271.65 12681.1,271.65 ; 12015.75,3263.78 12669.29,3263.78
  Bottom Layer w27.56: 70.3@8307.39,384.74 70.3@8307.39,384.89
  other v2: 139.42,1460.65 13840.58,2008.92 13840.27,2758.92 139.42,2960.65 1499.24,4090.58 3090.02,4090.58 5483.61,4090.58 6280.49,4090.58 7871.27,4090.58 9465.02,4090.58 10264.86,4090.58 11061.74,4090.58 12655.49,4090.58
pads on no net: 1. 2. 3. 4. 5. 6. 7. 8. 9. 10. 11. 12. 13. 14. 15. 16. 17. 18. 19. 20. 21. 22. 23. 24. 25. 26. 27. 28. 29. 30. 31. 32. 33. 34. 35. 36. 37. 38. 39. 40. 41. 42. 43. 44. 45. 46. 47. 48. 49. 50. 51. 52. 53. 54. 55. 56. 57. 58. 59. 60. 61. 62. 63. 64. 65. 66. 67. 68. 69. 70. 71. 72. 73. 74. 75. 76. *1.1 *1.2 *1.3 *1.4 *2. *3. *4. *5. *6. *8. *9. *10. *11. *12. *13. *14. *15. *16. *17. *18. *20. *21. *22. *23. *24. *25. *26. *27. *28. *29. *30. *31. *32. *33. *34. *34.2 *35. *36. *37. *38. *39. *40. *41. *42. *43. *44. *. ?. U1.27 U1.28 U1.36
copper on no net: | length 1655.1
  Top Layer w25: 5090.03,1007.86 5840.03,1007.86
  Bottom Layer w5: v2@5842.52,523.62 5881.89,484.25 6090.55,484.25 6106.3,468.5 6165.35,468.5 ; v2(5842.52,598.43) 5901.57,539.37 5933.07,507.87 6102.36,507.87 6108.96,501.27 6164.08,501.27 6165.35,500 ; v2(6259.84,905.51) 6295.28,870.08 6295.28,724.41
  other v2: 5842.52,527.56

## Other copper
Bottom Layer:
  rectangle net VCC: 6586.61,468.5 6641.73,500

## Silkscreen, mask and mechanical layers (free items; w line width, h text height)
Top Overlay:
  text "- By Skaytacium and NNNI" at 365.7,1799.25 h70 r90
  text "Skayboard" at 286.16,1410.23 h250 r90